# EAGLE board v_reg (EAGLE 8.5.0)
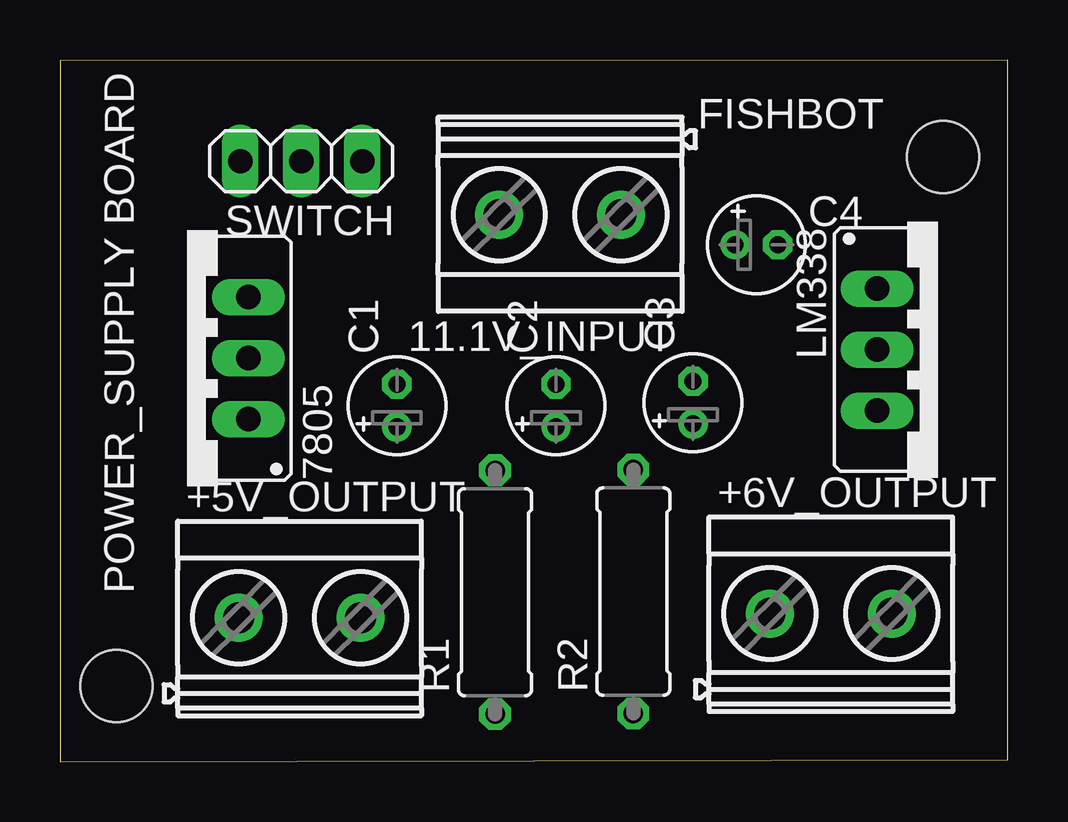
[diagram p0: board, top side]
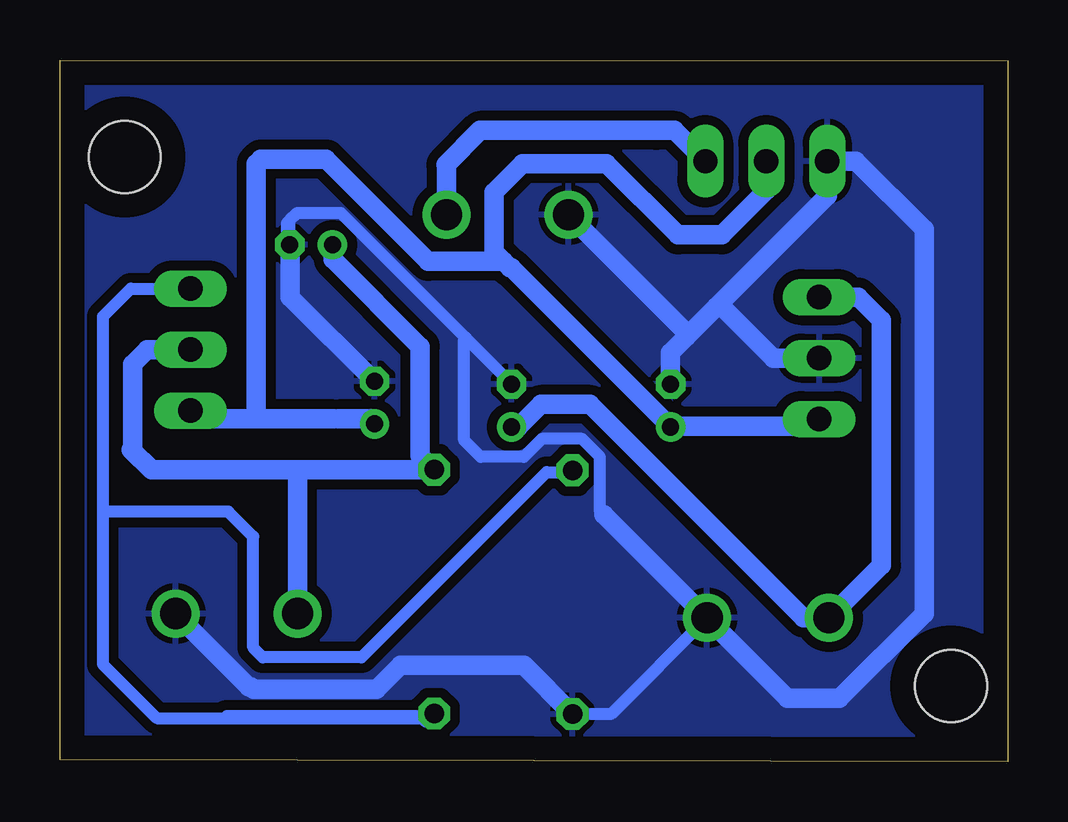
[diagram p1: board, bottom side, seen from below]

Size 39.5 x 29.24 mm. Coordinates in mm from the lower left corner, seen from the top.
Outline: 0,0 39.5,0.08 39.5,29.24 0,29.21 0,0
Copper layers (1*16): Top 0.035mm / dielectric 1.5mm / Bottom 0.035mm
Design rules "default *": minimum track width 6mil, minimum drill 0.35mm, track to track 15mil, track to pad 6mil, pad to pad 6mil, via to via 6mil, smd to smd 6mil, copper to edge 40mil, drill to drill 6mil, minimum pad ring 10mil, minimum via ring 8mil, stop-mask expansion 4mil, vias tented up to drill 0mil, thermal gap 10mil
Holes 3 mm at 36.8,25.2 2.36,3.15

## Footprints (pad centres in the part's own frame; a part is rotated, then mirrored left to right if it is on the bottom)
MKDSN1,5/2-5,08 = drill 1.3 pad 2: 1 -2.561,0.025; 2 2.519,0.025
78XXS = drill 1.016 long: GND 0,-2.54; IN -2.54,-2.54; OUT 2.54,-2.54
E1,8-4 = drill 0.711 pad 1.168: + -0.889,0 | drill 0.711 pad 1.168 octagon: - 0.889,0
TO220S = drill 1.016 long: 1 -2.54,-2.54; 2 0,-2.54; 3 2.54,-2.54
0309/10 = drill 0.813 octagon: 1 -5.08,0; 2 5.08,0
1X03 = drill 1.016 long: 1 -2.54,0; 2 0,0; 3 2.54,0

## Placement (x,y rotation side)
11.1V_INPUT  .  [MKDSN1,5/2-5,08]  20.83,22.81 180 top
7805  [78XXS]  5.31,16.81 90 top
+5V_OUTPUT  .  [MKDSN1,5/2-5,08]  10.01,5.97 0 top
+6V_OUTPUT  .  [MKDSN1,5/2-5,08]  32.16,6.15 0 top
C1  0.33u  [E1,8-4]  14.05,14.83 90 top
C2  0.1u  [E1,8-4]  20.68,14.83 90 top
C3  0.1uF  [E1,8-4]  26.39,14.96 90 top
C4  1uF  [E1,8-4]  29.03,21.54 0 top
LM338  [TO220S]  36.6,17.17 270 top
R1  470  [0309/10]  18.14,7.06 90 top
R2  120  [0309/10]  23.9,7.09 90 top
SWITCH  [1X03]  10.06,25.02 180 top

## Library data of the parts
11.1V_INPUT +5V_OUTPUT +6V_OUTPUT = con-phoenix-508
7805 LM338 = v-reg
C1-C4 R1 R2 = resistor
SWITCH = pinhead

## Nets
11.1V: 11.1V_INPUT.1 SWITCH.1
+5V: 7805.OUT +5V_OUTPUT.1 C2.+
+6V: +6V_OUTPUT.1 C4.+ LM338.2 R2.2
GND: 11.1V_INPUT.2 7805.GND +5V_OUTPUT.2 +6V_OUTPUT.2 C1.- C2.- C3.- C4.- R1.1 SWITCH.3
N$2: LM338.1 R1.2 R2.1
SWITCH_OP: 7805.IN C1.+ C3.+ LM338.3 SWITCH.2

## Tracks (layer width: path | path; a pad name or v marks a point on that pad's centre or on a via)
11.1V
  Bottom 0.508: 12.86,25.08 SWITCH.1 | 23.34,22.86 11.1V_INPUT.1
  Bottom 0.813: 11.1V_INPUT.1 23.39,24.84 23.42,24.87 21.99,26.3 14.66,26.3 13.88,26.3 SWITCH.1
+5V
  Bottom 0.508: 20.49,13.97 C2.+
  Bottom 0.813: C2.+ 20.4,13.95 19.46,14.88 17.4,14.88 8.51,5.99 +5V_OUTPUT.1 5.26,8.18 5.26,18.39 6.22,19.36 7805.OUT
+6V
  Bottom 0.508: 25.56,18.41 28.1,20.95 28.1,21.27 28.12,21.35 C4.+ | 33.82,17.14 LM338.2
  Bottom 0.813: 28.12,21.35 28.12,20.93 24.49,17.3 24.49,12.75 R2.2 29.32,12.17 | +6V_OUTPUT.1 29.6,11.9 29.32,12.17 | 29.32,12.17 35.69,12.17 36.53,13.01 36.47,13.06 36.47,16.56 35.86,17.17 LM338.2
GND
  Bottom 0.508: 13.82,15.88 C1.- | 8.1,16.51 7805.GND | 18.26,22.54 11.1V_INPUT.2 | 22.59,17.67 27.79,22.86 29.62,22.86 29.92,22.55 | 22.59,17.67 20.8,15.88 C2.- 20.8,15.56 | 29.69,21.59 C4.- | C4.- 29.9,21.51 30.05,21.66 30.05,22.43 29.92,22.55 | 22.59,17.67 22.66,17.6 22.66,13.39 21.97,12.7 20.17,12.7 19.42,13.45 17.74,13.45 16.99,12.7 16.99,10.46 16.82,10.29 | 31.55,3.12 31.28,2.86 26.49,2.86 | +5V_OUTPUT.2 16.54,1.98 R1.1 | C4.- 29.92,22.55
  Bottom 0.813: 12.13,18.96 7.52,23.57 SWITCH.3 6.32,25.02 3.48,22.17 3.48,6.17 7,2.64 9.17,2.64 +5V_OUTPUT.2 16.82,10.29 | 7805.GND 9.75,16.82 11.9,18.96 12.13,18.96 | C1.- 14.05,17.04 13.39,17.7 | 13.39,17.7 12.13,18.96 | 11.1V_INPUT.2 13.39,17.86 13.39,17.7 | C3.- 29.9,19.36 29.9,21.51 | R1.1 20.17,4.01 25.3,4.01 26.3,3.01 31.43,3.01 31.55,3.12 31.63,3.12 +6V_OUTPUT.2
  pour Bottom (isolate 0.406): 0.51,28.83 38.96,28.83 39.01,0.53 0.56,0.53
N$2
  Bottom 0.508: R1.2 18.26,12.06 19.22,12.06 26.93,4.35 31.05,4.35 31.45,4.75 31.45,9.37 32.49,10.41 37.59,10.41 | 34.14,19.68 LM338.1 36.55,19.71 37.72,18.54 37.72,10.54 | 32.55,1.91 23.98,1.91 R2.1 | 24.18,1.82 35.47,1.82 37.72,4.06 37.72,10.29 | 37.72,10.54 37.72,10.29 | 37.59,10.41 37.72,10.29 | 37.59,10.41 37.72,10.54
  Bottom 0.813: 24.18,1.82 24.09,1.91 23.98,1.91
SWITCH_OP
  Bottom 0.508: 27.89,14.29 28.1,14.29 | 34.14,14.61 LM338.3 | 7805.IN 8.1,13.97 13.82,13.97 C1.+ 14.13,13.97
  Bottom 0.813: 7805.IN 8.15,13.97 13.82,13.97 14.13,13.97 | SWITCH.2 10.06,23.8 11.91,21.95 13.74,21.95 16.71,24.92 20.22,24.92 21.41,23.72 21.41,21.61 21.41,21.24 21.01,20.85 | 28.1,14.29 31.32,14.29 | 31.32,14.29 33.82,14.29 34.14,14.61 | C3.+ 26.61,14.29 27.89,14.29 | 14.11,13.95 C1.+ 20.68,20.58 20.75,20.58 21.01,20.85 | 21.01,20.85 24.15,20.85 28.4,25.1 31.13,25.1 31.32,24.92 31.32,14.29

## Text on the board
tNames: FISHBOT | POWER_SUPPLY BOARD